# EAGLE board gate delay v2 PANEL (EAGLE 7.7.0)
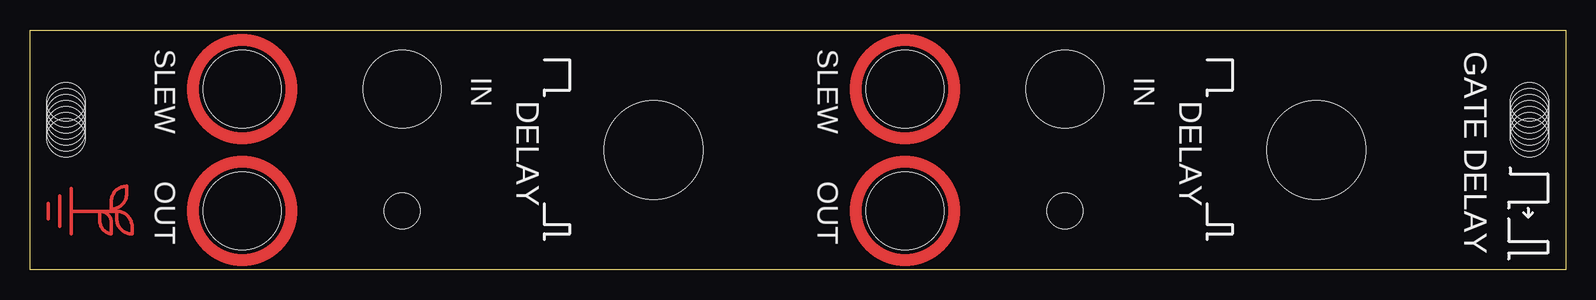
[diagram p0: board, top side]
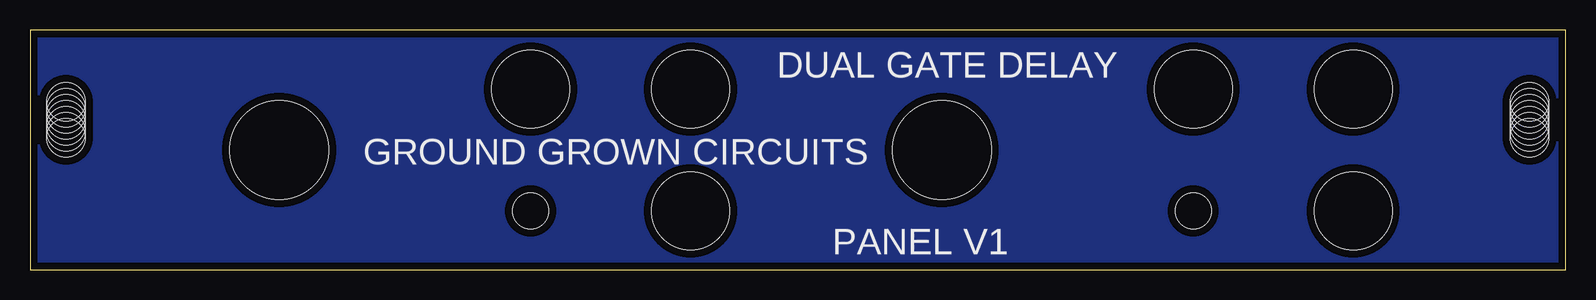
[diagram p1: board, bottom side, seen from below]

Size 128 x 20 mm. Coordinates in mm from the lower left corner, seen from the top.
Outline: 0,0 0,20 128,20 128,0 0,0
Copper layers (1*16): Top 0.035mm / dielectric 1.5mm / Bottom 0.035mm
Design rules "SparkFun": minimum track width 8mil, minimum drill 20mil, track to track 8mil, track to pad 8mil, pad to pad 8mil, via to via 8mil, smd to smd 8mil, copper to edge 8mil, drill to drill 8mil, minimum pad ring 12mil, minimum via ring 10mil, stop-mask expansion 4mil, vias tented up to drill 20mil, thermal gap 10mil

## Footprints (pad centres in the part's own frame; a part is rotated, then mirrored left to right if it is on the bottom)
LED_3MM_DRILL = hole 3: 0,0
MOUNT_DRILL = hole 3.2: 3,9; 3,8.5; 3,8; 3,7.5; 3,7; 3,6.5; 3,6
JACK_DRILL_COPPER_EXS = hole 6.5: 0,0
JACK_DRILL = hole 6.5: 0,0
POT_DRILL = hole 8.25: 0,0

## Placement (x,y rotation side)
D2  [LED_3MM_DRILL]  86.28,4.9 180 top
D5  [LED_3MM_DRILL]  31.03,4.9 180 top
E$1  [MOUNT_DRILL]  0,20 180 bottom
E$2  [MOUNT_DRILL]  128,20 180 top
E$3  [LOGO_SMALL_COPPER]  3.5,4.88 270 top
G1  [JACK_DRILL_COPPER_EXS]  72.94,4.9 270 top
G2  [JACK_DRILL_COPPER_EXS]  17.7,4.9 270 top
IN1  [JACK_DRILL]  86.28,15.06 90 top
IN2  [JACK_DRILL]  31.03,15.06 90 top
RV1  [POT_DRILL]  107.23,9.98 180 top
RV2  [POT_DRILL]  51.98,9.98 180 top
S1  [JACK_DRILL_COPPER_EXS]  72.94,15.06 270 top
S2  [JACK_DRILL_COPPER_EXS]  17.7,15.06 270 top

## Library data of the parts
D2 D5 E$1-E$3 G1 G2 IN1 IN2 S1 S2 = GroundGrownCircuits
RV1 RV2 = GroundGrownCircuits; PROD_ID: RES-09177

## Tracks (layer width: path | path; a pad name or v marks a point on that pad's centre or on a via)
S$1
  pour Bottom (isolate 0.61): 0,0 0,20 128,20 128,0

## Text on the board
tPlace: SLEW | IN | SLEW | IN | DELAY | DELAY | GATE DELAY | OUT | OUT
bPlace: DUAL GATE DELAY | GROUND GROWN CIRCUITS | PANEL V1